# EAGLE board Girraffe V3.4 (EAGLE 7.7.0)
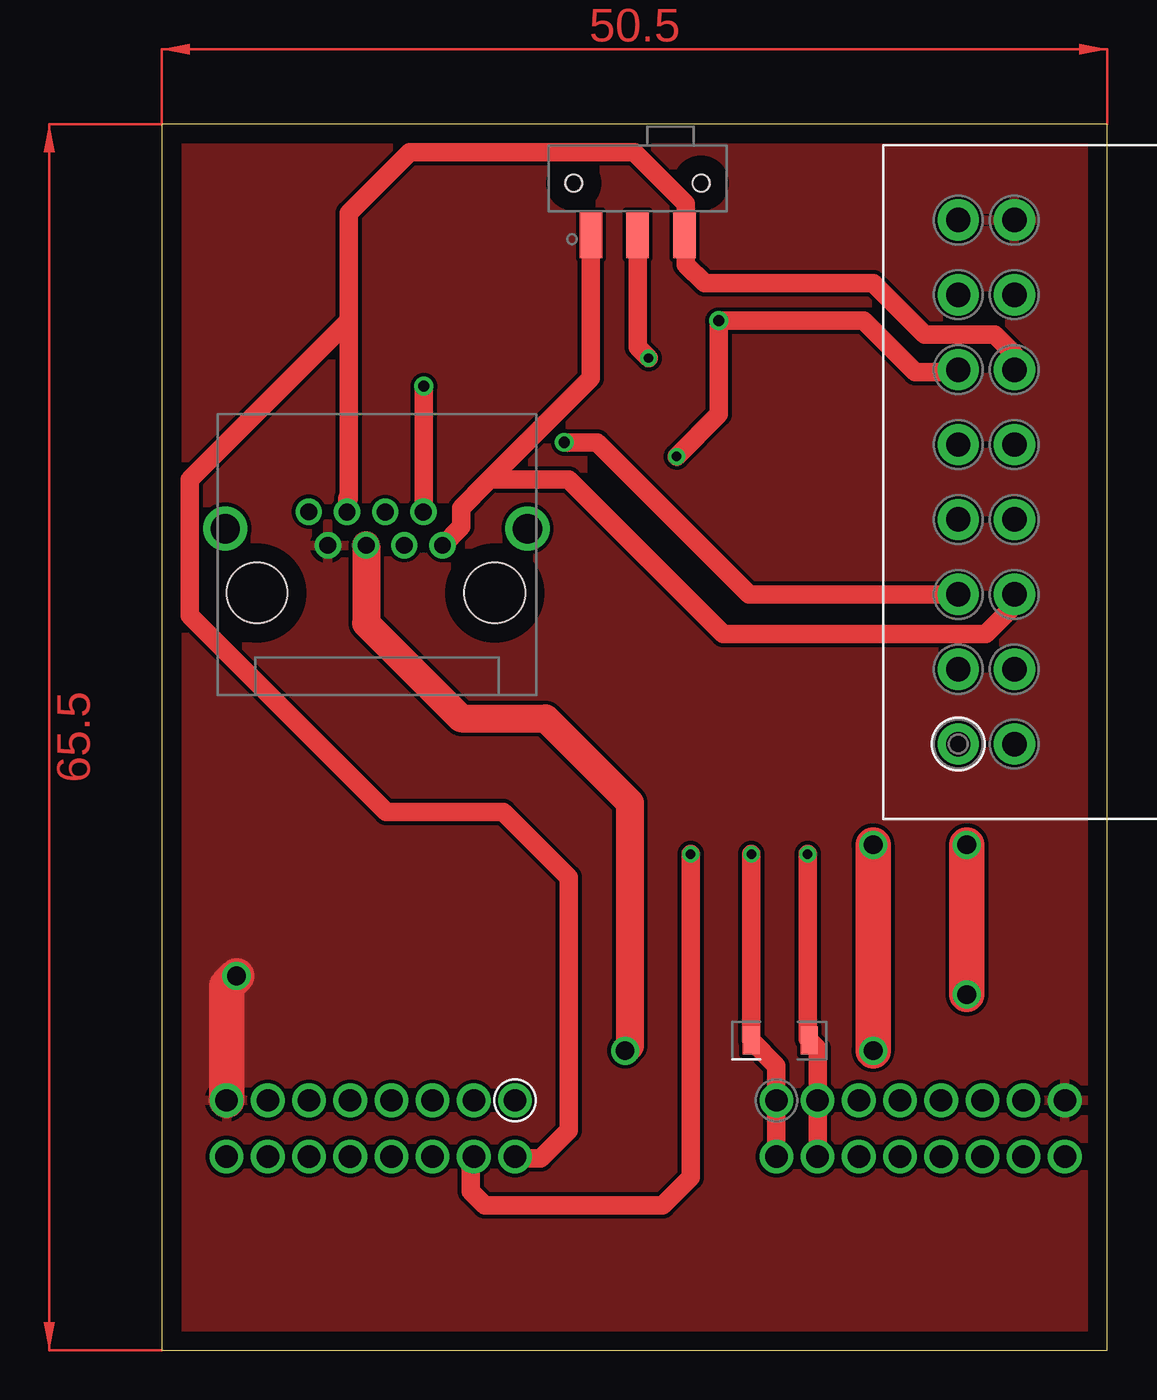
[diagram p0: board, top side]
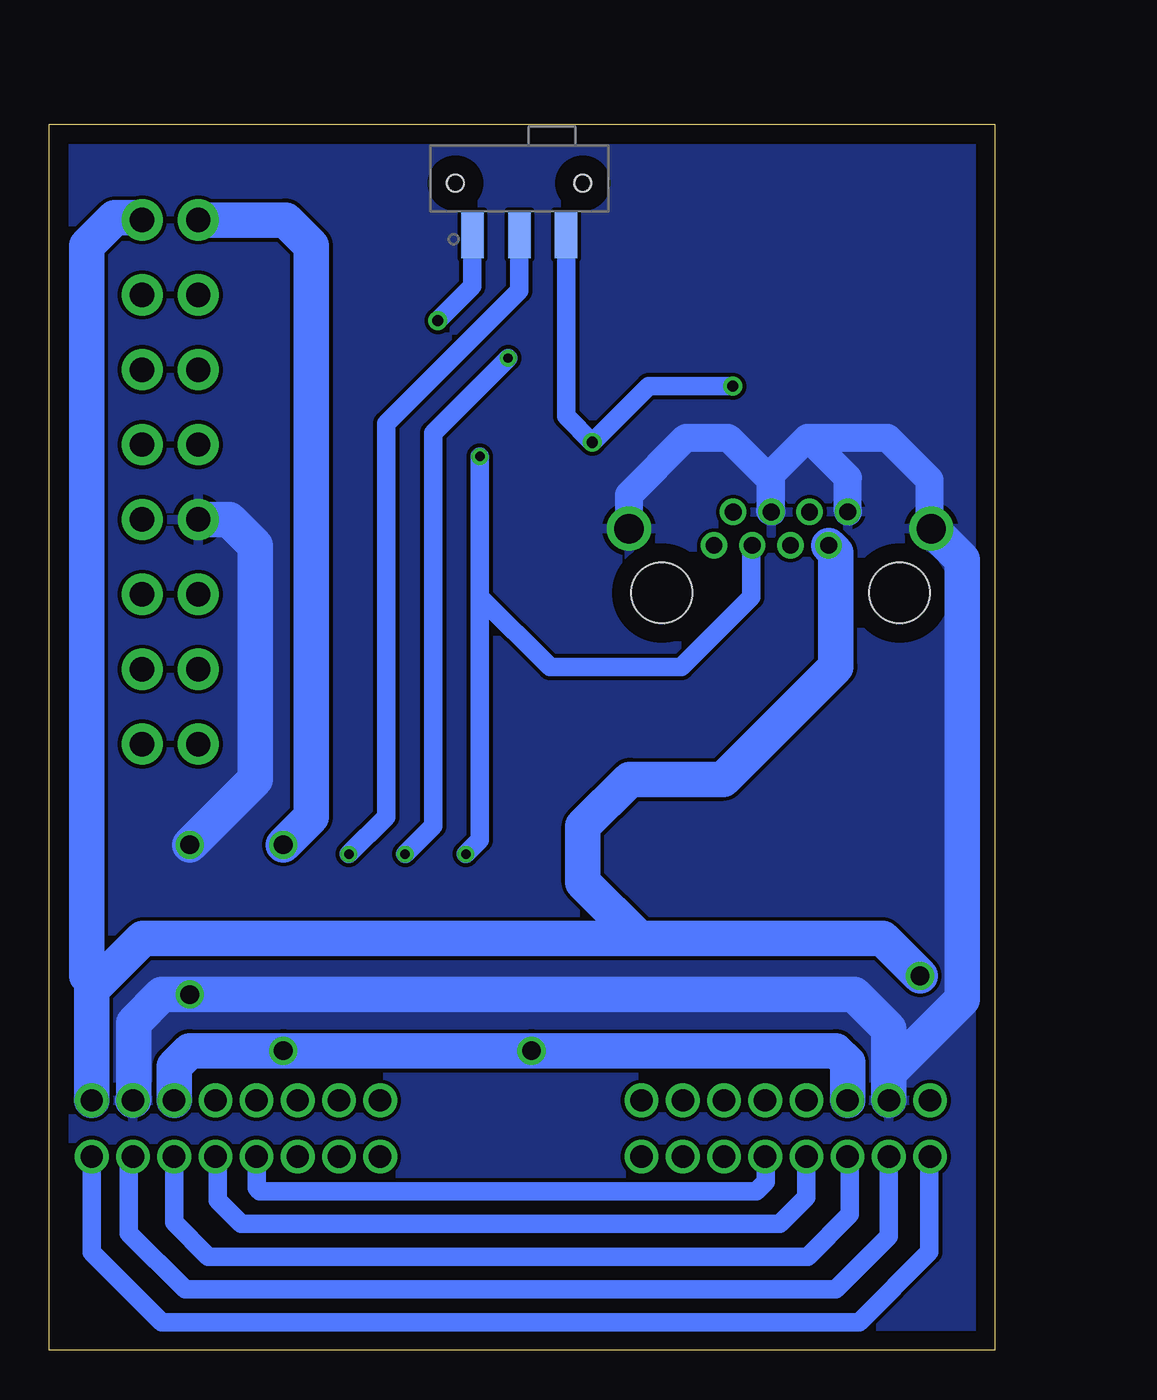
[diagram p1: board, bottom side, seen from below]

Size 50.5 x 65.5 mm. Coordinates in mm from the lower left corner, seen from the top.
Outline: 0,0 50.5,0 50.5,65.5 0,65.5 0,0
Copper layers (1*16): Top 0.035mm / dielectric 1.5mm / Bottom 0.035mm
Design rules "default": minimum track width 10mil, minimum drill 24mil, track to track 8mil, track to pad 8mil, pad to pad 8mil, via to via 8mil, smd to smd 8mil, copper to edge 40mil, drill to drill 8mil, minimum pad ring 10mil, minimum via ring 8mil, stop-mask expansion 4mil, vias tented up to drill 0mil, thermal gap 10mil

## Footprints (pad centres in the part's own frame; a part is rotated, then mirrored left to right if it is on the bottom)
120OHM = smd 0.9 x 1.5: 1 0,0; 2 3.1,0
OBDII = drill 1.3 pad 2.2: 1 0,0; 2 0,-4; 3 0,-8; 4 0,-12; 5 0,-16; 6 0,-20; 7 0,-24; 8 0,-28; 9 -3,0; 10 -3,-4; 11 -3,-8; 12 -3,-12; 13 -3,-16; 14 -3,-20; 15 -3,-24; 16 -3,-28
R137 = drill 1.2: 1 0,0; 2 -2.2,0; 3 -4.4,0; 4 -6.6,0; 5 -8.8,0; 6 -11,0; 7 -13.2,0; 8 -15.4,0; 9 0,-3; 10 -2.2,-3; 11 -4.4,-3; 12 -6.6,-3; 13 -8.8,-3; 14 -11,-3; 15 -13.2,-3; 16 -15.4,-3
R137OUT = drill 1.2: 1 0,0; 2 2.2,0; 3 4.4,0; 4 6.6,0; 5 8.8,0; 6 11,0; 7 13.2,0; 8 15.4,0; 9 0,-3; 10 2.2,-3; 11 4.4,-3; 12 6.6,-3; 13 8.8,-3; 14 11,-3; 15 13.2,-3; 16 15.4,-3
SLIDESWITCH = smd 1.2 x 2.5: 1 -2.5,0; 2 0,0; 3 2.5,0 | hole 0.9: 3.4,2.75; -3.4,2.75
VERRJ45 = drill 0.9: 12V -6.12,0; CAN1H -2.04,0; CAN1L -5.1,1.78; CAN2H -1.02,1.78; CAN2L 0,0; GND@1 -7.14,1.79; GND@5 -3.06,1.78; IGN -4.08,0 | drill 1.57: GND@9 -11.6,0.89; GND@10 4.54,0.89 | hole 3.25: 2.79,-2.54; -9.91,-2.54

## Placement (x,y rotation side)
U$1  120OHM  [120OHM]  31.48,16.55 0 top
U$2  OBDII90DEG  [OBDII]  42.54,32.38 180 top
U$3  R137IN  [R137]  18.87,13.35 0 top
U$4  R137OUT  [R137OUT]  32.83,13.35 0 top
U$5  SLIDESWITCH  [SLIDESWITCH]  25.42,59.6 0 top
U$6  SLIDESWITCH  [SLIDESWITCH]  25.4,59.6 0 bottom
U$7  [VERRJ45]  15,43 0 top

## Library data of the parts
U$1-U$7 = Giraffe

## Nets
12V: U$2.16 U$3.8 U$4.8 U$7.12V
ACC: U$2.8 U$3.6 U$4.6 U$7.IGN
GND: U$2.4 U$3.7 U$4.7 U$7.GND@1 U$7.GND@5 U$7.GND@9 U$7.GND@10
N$1: U$1.1 U$4.1 U$4.9
N$2: U$1.2 U$4.2 U$4.10 U$6.2
N$3: U$2.14 U$3.9 U$5.3 U$7.CAN1L
N$4: U$2.11 U$5.1 U$7.CAN2L
N$5: U$2.6 U$3.10 U$6.1 U$7.CAN1H
N$6: U$2.3 U$6.3 U$7.CAN2H
N$7: U$3.16 U$4.16
N$8: U$3.15 U$4.15
N$9: U$3.14 U$4.14
N$10: U$3.13 U$4.13
N$11: U$3.12 U$4.12
S$1: U$5.2

## Tracks (layer width: path | path; a pad name or v marks a point on that pad's centre or on a via)
12V  (via drill 1)
  Top 1.9: U$3.8 3.47,19.47 v4,20
  Bottom 1.9: U$4.8 48.23,19.27 | 48.23,19.27 45.5,22 19,22 | 19,22 6,22 v4,20 | 48.23,19.27 48.23,19.73 48.5,20 48.5,59 47,60.5 45.66,60.5 U$2.16 | U$7.12V 8.5,42.62 8.5,36.5 14.5,30.5 19.5,30.5 22,28 22,25 19,22
  pour Top: 1,64.5 49.5,64.5 49.5,1 1,1
ACC  (via drill 1)
  Top 1.5: U$7.IGN 10.92,38.83 16,33.75 20.5,33.75 25,29.25 25,16.25 v24.75,16
  Top 1.9: v38,27 v38,16
  Bottom 1.9: U$4.6 43.83,15.17 43,16 v38,16 v24.75,16 8.5,16 7.87,15.37 U$3.6 | U$2.8 37.88,60.38 36.5,59 36.5,28.5 v38,27
GND  (via drill 1)
  Top 1.9: v43,27 v43,19
  Bottom 1.5: U$7.GND@10 19.54,45.71 16.5,48.75 14.25,48.75 12,46.5 12,44.84 U$7.GND@5 11.94,46.81 10,48.75 9.5,48.75 | 9.5,48.75 5.75,48.75 3.5,46.5 3.5,43.99 U$7.GND@9 | U$7.GND@1 7.86,46.61 9.5,48.25 9.5,48.75
  Bottom 1.9: U$4.7 46,13.38 46,17.5 44.5,19 v43,19 7.5,19 5.67,17.17 U$3.7 5.67,14.83 1.75,18.75 1.75,42.24 U$7.GND@9 | U$2.4 40.88,44.38 39.5,43 39.5,30.5 v43,27
  pour Bottom: 1,64.5 49.5,64.5 49.5,1 1,1
N$1  (via drill 0.5)
  Top 1: U$4.9 U$4.1 32.83,15.2 U$1.1 31.5,16.57 v31.5,26.5
N$2  (via drill 0.5)
  Top 1: U$4.10 U$4.2 35.03,16.1 U$1.2 34.5,16.63 v34.5,26.5
  Bottom 1: v34.5,26.5 32.5,28.5 32.5,49.5 25.4,56.6 U$6.2
N$3
  Top 1: U$2.14 45.54,53.21 44.5,54.25 40.75,54.25 38,57 29,57 28,58 28,59.52 | 28,59.52 U$5.3 | 28,59.52 28,61.25 25.25,64 13.25,64 10,60.75 10,55 | 10,55 10,45.5 9.9,45.5 U$7.CAN1L 10,44.88 | 10,55 1.5,46.5 1.5,39.25 12,28.75 18.25,28.75 21.75,25.25 21.75,11.75 20.25,10.25 18.97,10.25 U$3.9
N$4
  Top 1: 45.54,40.96 U$2.11 45.54,39.79 44,38.25 30,38.25 21.75,46.5 17.5,46.5 | 17.5,46.5 17.38,46.38 16,45 16,44 U$7.CAN2L | U$5.1 22.92,51.92 17.5,46.5
N$5  (via drill 0.5, 0.6)
  Top 1: U$2.6 42.41,52.25 40.25,52.25 37.5,55 v29.75,55 29.75,50 v27.5,47.75 | v28.25,26.5 28.25,9.25 26.75,7.75 17.25,7.75 16.5,8.5 16.5,10.18 U$3.10
  Bottom 1: U$6.1 27.9,56.85 v29.75,55 | v27.5,47.75 27.5,40.25 | 27.5,40.25 23.75,36.5 16.75,36.5 13,40.25 13,42.96 U$7.CAN1H | 27.5,40.25 27.5,27.25 v28.25,26.5
N$6  (via drill 0.6)
  Top 1: U$2.3 31.37,40.38 23.25,48.5 v21.5,48.5 | v14,51.5 14,44.8 U$7.CAN2H
  Bottom 1: U$6.3 22.9,49.9 v21.5,48.5 18.5,51.5 v14,51.5
N$7
  Bottom 1: U$4.16 48.23,5.23 44.5,1.5 7.25,1.5 3.5,5.25 3.5,10.32 U$3.16
N$8
  Bottom 1: U$3.15 5.67,6.08 8.5,3.25 43.25,3.25 46.25,6.25 46.25,10.13 U$4.15
N$9
  Bottom 1: U$4.14 43.83,6.83 42,5 10,5 7.75,7.25 7.75,10.23 U$3.14
N$10
  Bottom 1: U$3.13 10.07,8.18 11.5,6.75 40.25,6.75 41.5,8 41.5,10.22 U$4.13
N$11
  Bottom 1: U$4.12 39.43,8.68 39.25,8.5 12.75,8.5 12.25,9 12.25,10.33 U$3.12
S$1  (via drill 0.5)
  Top 1: U$5.2 25.42,53.58 v26,53
  Bottom 1: 31.5,26.5 30,28 30,49 v26,53
S$2
  pour Top: 1,64.5 22.5,64.5 22.5,45.5 1,45.5
(copper drawn outside any net)
  shapes: Top area x2